# Allegro board backup.brd
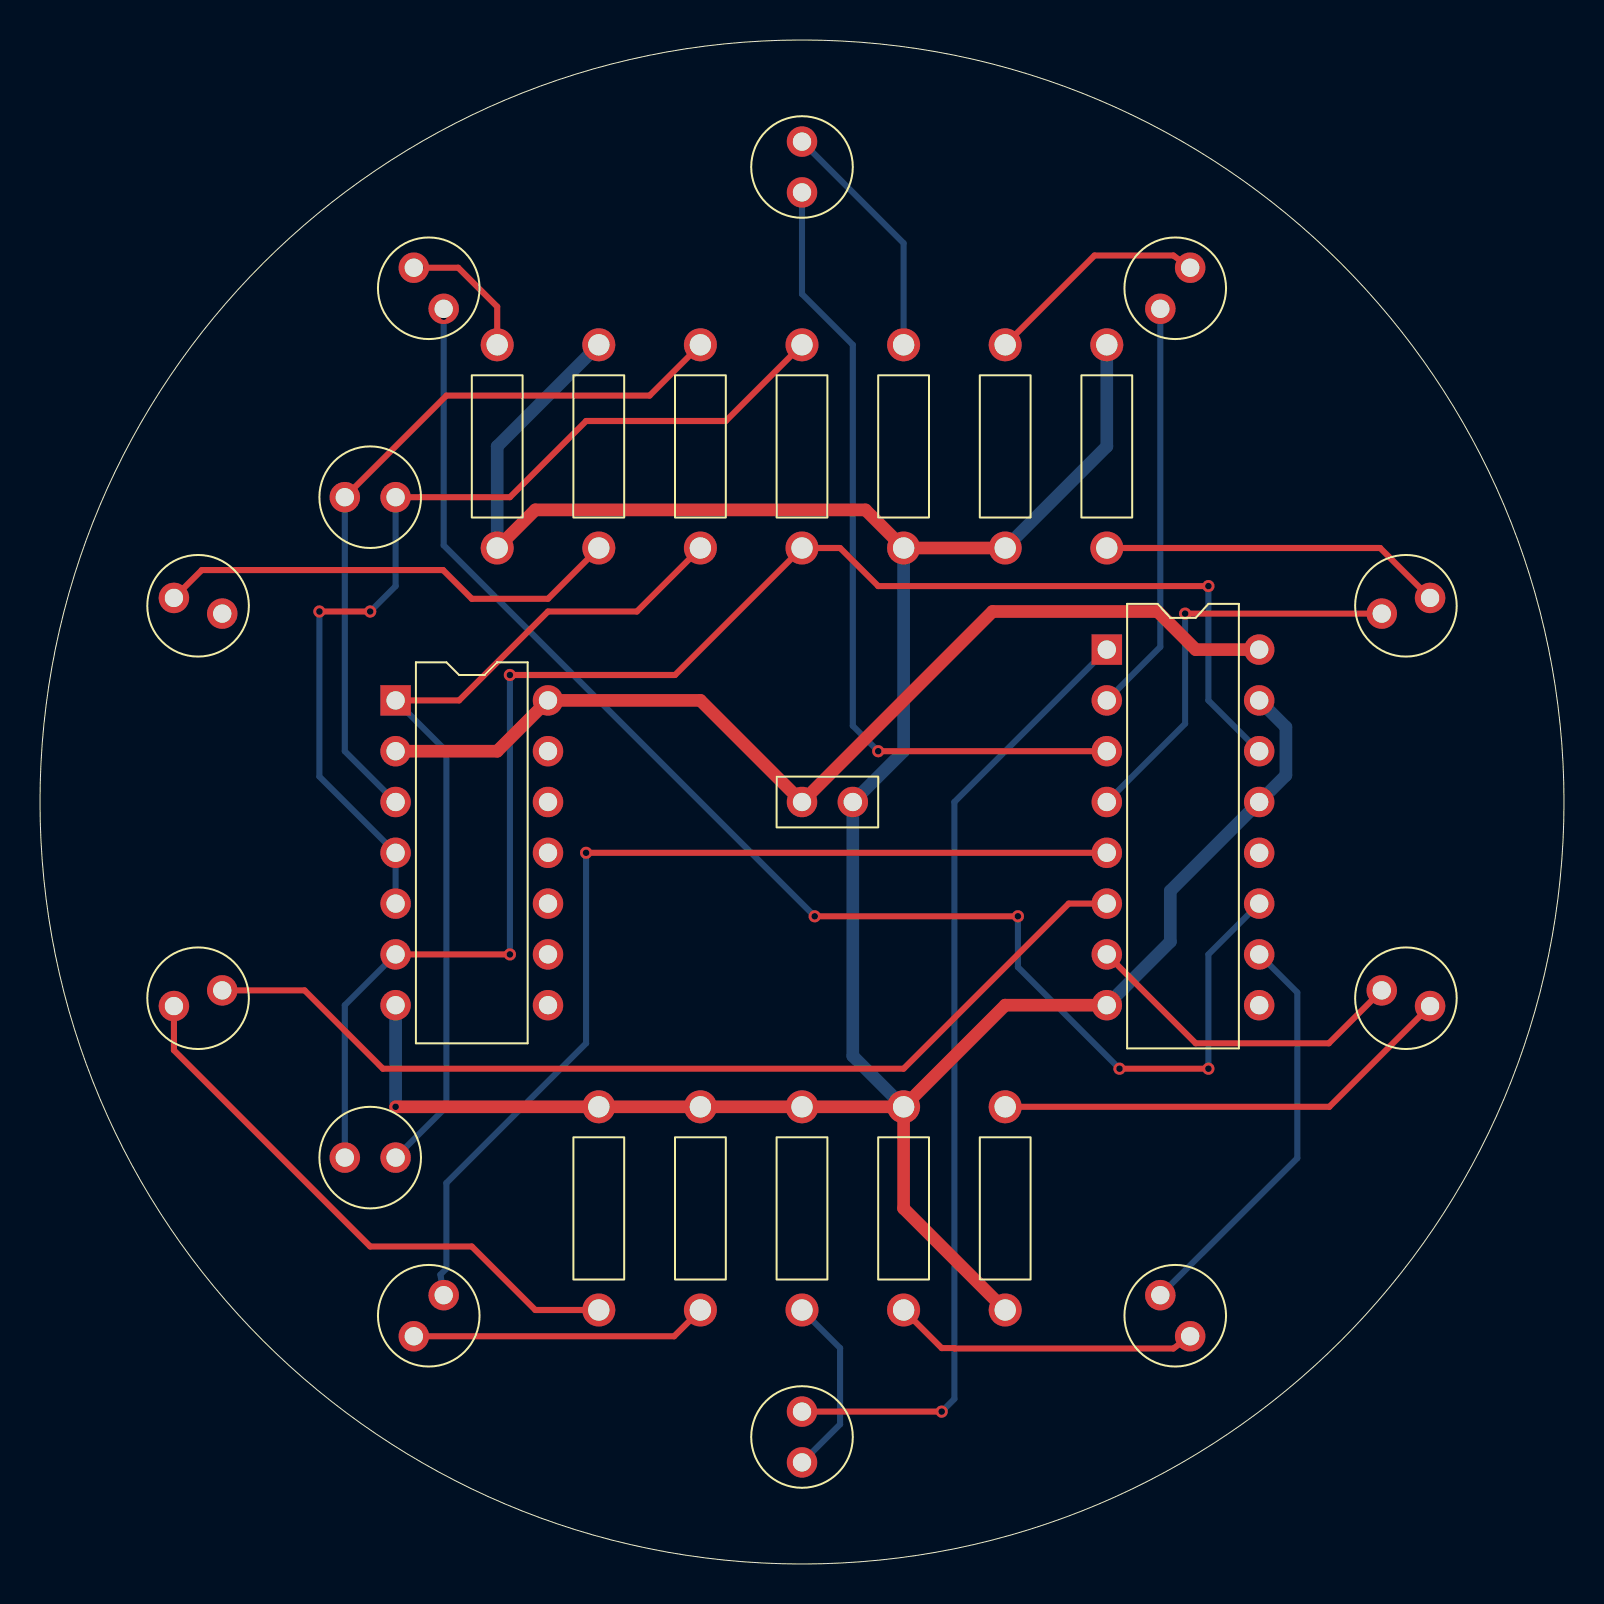
[diagram p0: board, top side]
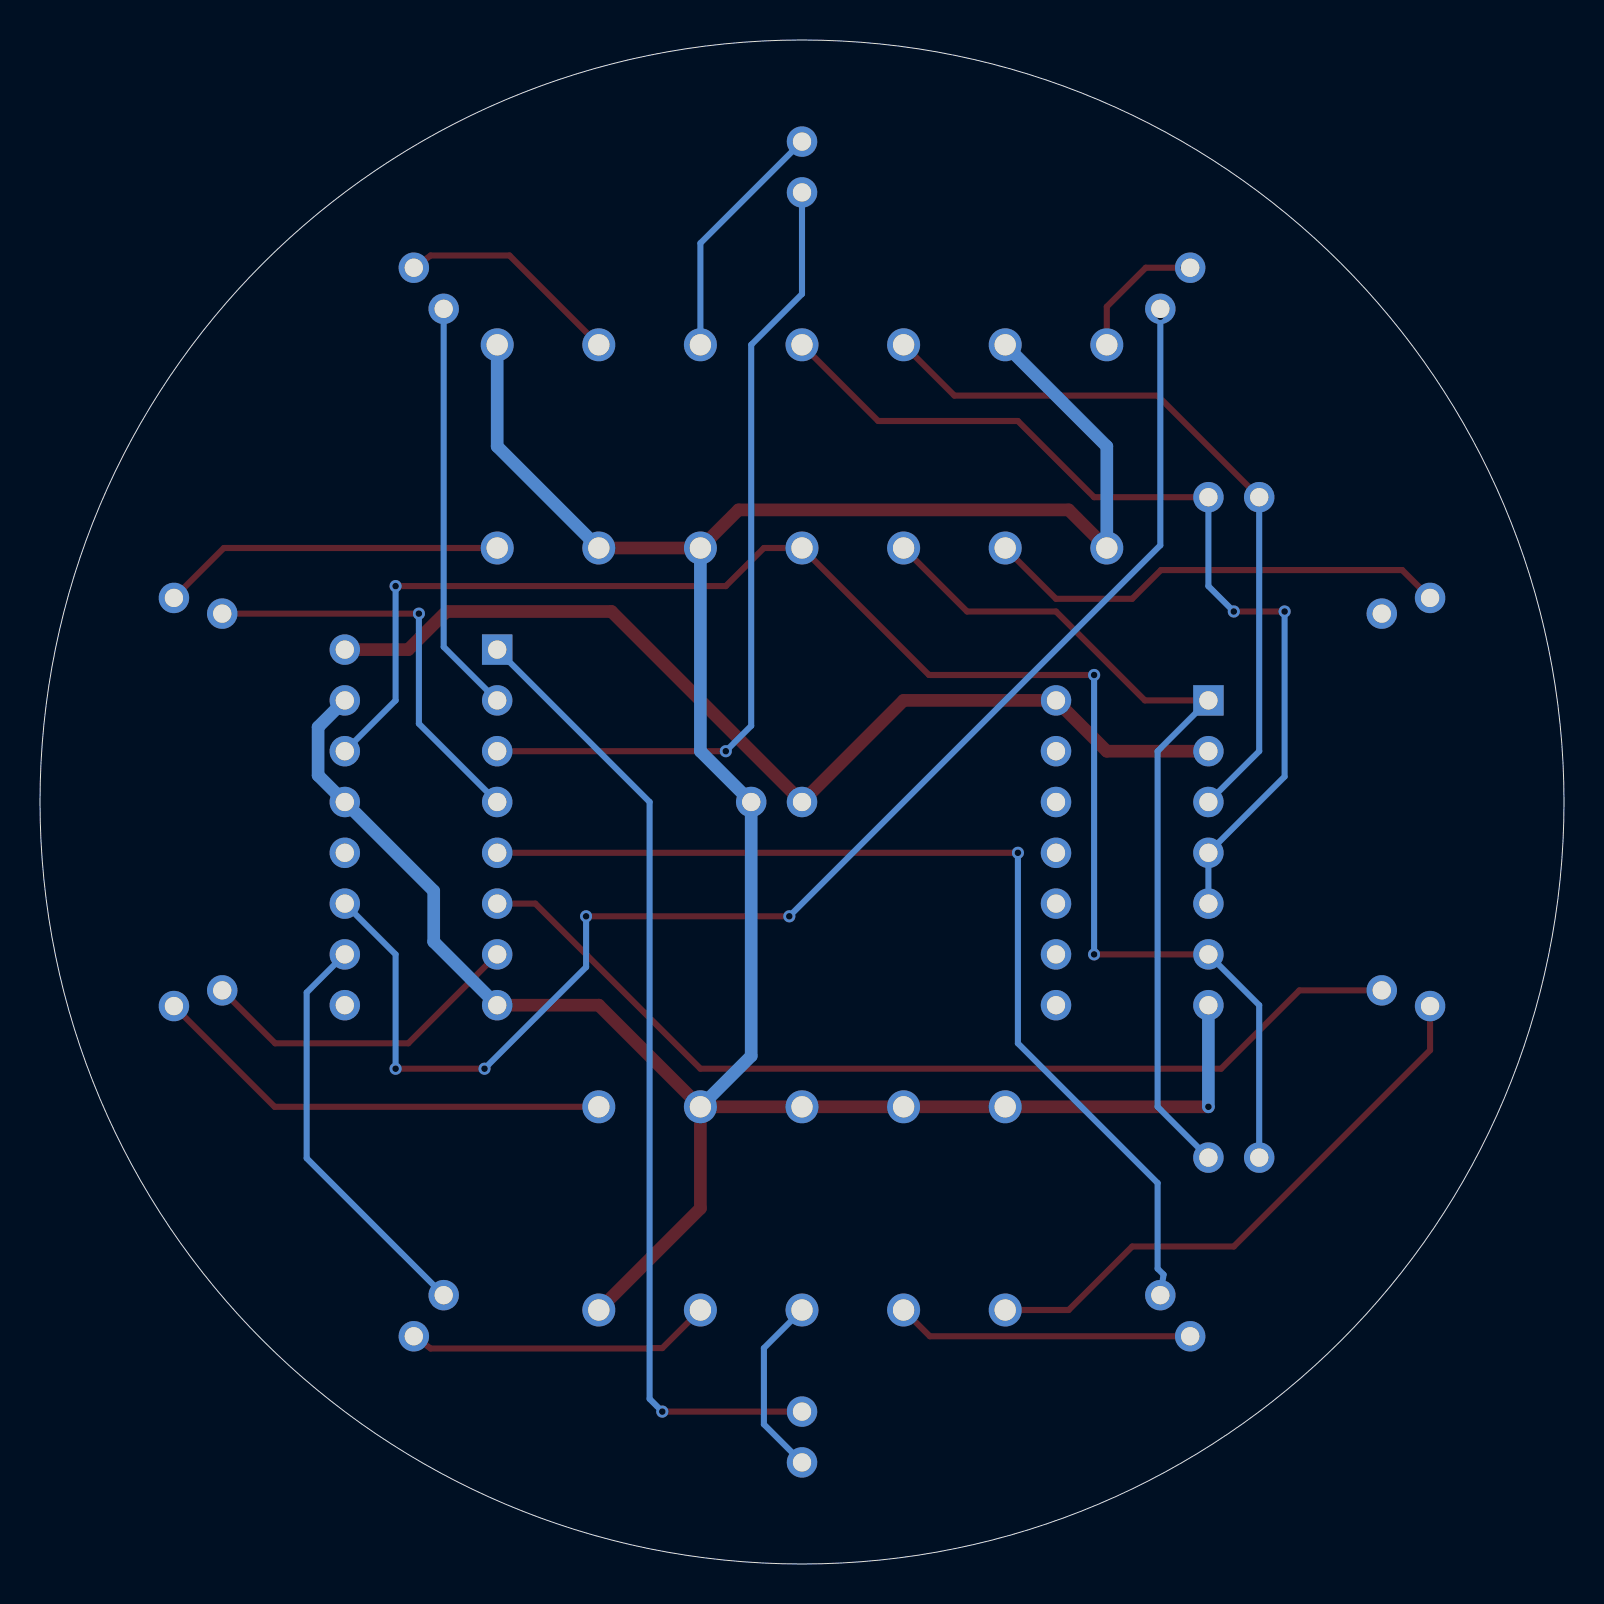
[diagram p1: board, bottom side, seen from below]

Outline 76.2 x 76.2 mm; copper layers: TOP, BOTTOM. Coordinates in mm from the lower left corner of the outline.
Outline path: circle c38.1,38.1 r38.1

## Design rules (mm)
nets with their own width: min track width 0.635; nets GND VCC

## Placement (name value [footprint] x y rotation side)
BT1  BATTERY  [JUMPER2]  38.1 38.1 0 top
C1  470uF  [CAP196]  15.24 53.34 270 top
C2  470uF  [CAP196]  15.24 20.32 270 top
D1  LED  [CAP196]  38.1 68.58 0 top
D2  LED  [CAP196]  56.02 62.76 324 top
D3  LED  [CAP196]  67.09 47.52 288 top
D4  LED  [CAP196]  67.09 28.68 252 top
D5  LED  [CAP196]  56.02 13.44 216 top
D6  LED  [CAP196]  38.1 7.62 180 top
D7  LED  [CAP196]  20.18 13.44 144 top
D8  LED  [CAP196]  9.11 28.68 108 top
D9  LED  [CAP196]  9.11 47.52 72 top
D10  LED  [CAP196]  20.18 62.76 36 top
R1  1k  [RES400]  33.02 60.96 180 top
R2  1k  [RES400]  38.1 60.96 180 top
R3  330  [RES400]  43.18 50.8 0 top
R4  330  [RES400]  48.26 50.8 0 top
R5  330  [RES400]  53.34 60.96 180 top
R6  330  [RES400]  48.26 12.7 0 top
R7  330  [RES400]  43.18 22.86 180 top
R8  330  [RES400]  38.1 22.86 180 top
R9  330  [RES400]  33.02 22.86 180 top
R10  330  [RES400]  27.94 22.86 180 top
R11  330  [RES400]  27.94 60.96 180 top
R12  330  [RES400]  22.86 50.8 0 top
U1  74LS00  [DIP14_3]  17.78 43.18 0 top
U2  CD4017B  [DIP16_3]  53.34 45.72 0 top

## Library data of the parts
BT1 = BATTERY: User Part Number: ***
C1 C2 = CAP: Tolerance: ***; User Part Number: ***
D1 = LED: Tolerance: ***; User Part Number: ***
D2-D10 = LED: User Part Number: ***; Tolerance: ***
R1-R12 = R: Tolerance: ***; User Part Number: ***
U1 = 74LS00: Tolerance: ***; User Part Number: ***
U2 = CD4017B: Tolerance: ***; User Part Number: ***

## Footprints (pads in the part's own frame, mm; a bottom-side part is the same pattern mirrored in y, then rotated)
CAP196
  round 1.524 hole 0.914: 1(0,0) 2(0,2.54)
DIP14_3
  rect 1.524x1.524 hole 0.914: 1(0,0)
  round 1.524 hole 0.914: 2(0,-2.54) 3(0,-5.08) 4(0,-7.62) 5(0,-10.16) 6(0,-12.7) 7(0,-15.24) 8(7.62,-15.24) 9(7.62,-12.7) 10(7.62,-10.16) 11(7.62,-7.62) 12(7.62,-5.08) 13(7.62,-2.54) 14(7.62,0)
DIP16_3
  rect 1.524x1.524 hole 0.914: 1(0,0)
  round 1.524 hole 0.914: 2(0,-2.54) 3(0,-5.08) 4(0,-7.62) 5(0,-10.16) 6(0,-12.7) 7(0,-15.24) 8(0,-17.78) 9(7.62,-17.78) 10(7.62,-15.24) 11(7.62,-12.7) 12(7.62,-10.16) 13(7.62,-7.62) 14(7.62,-5.08) 15(7.62,-2.54) 16(7.62,0)
JUMPER2
  round 1.524 hole 0.914: 1(0,0) 2(2.54,0)
RES400
  round 1.651 hole 1.067: 1(0,0) 2(0,10.16)

## Nets
GND: BT1.2(-) R3.1 R4.1 R5.1 R6.1 R7.1 R8.1 R9.1 R10.1 R11.1 R12.1 U1.7 U2.8 U2.13(C\K\E\) U2.15(RST)
VCC: BT1.1(+) U1.2(B) U1.14 U2.16(VDD)
N00817: C2.2 R1.2 U1.1(A)
N00832: C2.1 R2.2 U1.6(Y) U2.14(CLK)
N01324: D1.1(ANODE) U2.3(Q0)
N01364: D2.1(ANODE) U2.2(Q1)
N01448: D3.1(ANODE) U2.4(Q2)
N01540: D4.1(ANODE) U2.7(Q3)
N01640: D5.1(ANODE) U2.10(Q4)
N01748: D6.1(ANODE) U2.1(Q5)
N01807: D7.1(ANODE) U2.5(Q6)
N01929: D8.1(ANODE) U2.6(Q7)
N02059: D9.1(ANODE) U2.9(Q8)
N02197: D10.1(ANODE) U2.11(Q9)
N12221: C1.1 R1.1 U1.3(Y)
N14797: C1.2 R2.1 U1.4(A) U1.5(B)
N16175: D1.2(CATHODE) R3.2
N16274: D2.2(CATHODE) R4.2
N16375: D3.2(CATHODE) R5.2
N16478: D4.2(CATHODE) R6.2
N16583: D5.2(CATHODE) R7.2
N16690: D6.2(CATHODE) R8.2
N16799: D7.2(CATHODE) R9.2
N16910: D8.2(CATHODE) R10.2
N17023: D9.2(CATHODE) R11.2
N17138: D10.2(CATHODE) R12.2

Pads without a net: U1 8 9 10 11 12 13; U2 12

## Via types
v1: diameter 0.61, hole 0.33, TOP to BOTTOM, 38 vias

## Routing (per net, layer and track width the routed paths; a pad name or vN(x,y) marks a point on that pad's centre or on a via; arc(x,y) is an arc through that point)
GND: length 156.1
  TOP w0.635: U2.8 48.26,27.94 v1(43.18,22.86) ; v1(43.18,22.86) v1(38.1,22.86) R9.1 R10.1 v1(17.78,22.86) ; v1(43.18,22.86) 43.18,17.78 R6.1 ; R4.1 v1(43.18,50.8) 41.27,52.7 24.77,52.7 v1(22.86,50.8)
  BOTTOM w0.635: v1(43.18,50.8) 43.18,40.64 v1(40.64,38.1) 40.64,25.4 v1(43.18,22.86) ; U2.15 62.29,41.85 62.29,39.43 v1(60.96,38.1) 56.52,33.66 56.52,31.11 U2.8 ; v1(17.78,22.86) v1(17.78,27.94) ; R5.1 53.34,55.88 R4.1 ; v1(22.86,50.8) 22.86,55.88 v1(27.94,60.96)
VCC: length 51.1
  TOP w0.635: v1(17.78,40.64) 22.86,40.64 v1(25.4,43.18) 33.02,43.18 BT1.1 47.62,47.62 55.88,47.62 57.78,45.72 U2.16
N00817: length 43.4
  TOP w0.305: v1(17.78,43.18) 20.95,43.18 25.4,47.62 29.84,47.62 R1.2
  BOTTOM w0.305: C2.2 20.32,22.86 20.32,40.64 v1(17.78,43.18)
N00832: length 78.5
  TOP w0.305: v1(23.5,44.45) 31.75,44.45 R2.2 40.01,50.8 41.91,48.9 v1(58.42,48.9) ; v1(23.5,30.48) U1.6
  BOTTOM w0.305: U1.6 15.24,27.94 C2.1 ; U2.14 58.42,43.18 v1(58.42,48.9) ; v1(23.5,44.45) v1(23.5,30.48)
N01324: length 40.9
  TOP w0.305: v1(41.91,40.64) U2.3
  BOTTOM w0.305: v1(41.91,40.64) 40.64,41.91 40.64,60.96 38.1,63.5 v1(38.1,68.58)
N01364: length 20.7
  BOTTOM w0.305: D2.1 56.02,45.86 U2.2
N01448: length 20.9
  TOP w0.305: v1(67.09,47.52) v1(57.26,47.52)
  BOTTOM w0.305: U2.4 57.26,42.02 v1(57.26,47.52)
N01540: length 16.7
  TOP w0.305: D4.1 64.44,26.04 57.78,26.04 U2.7
N01640: length 20.7
  BOTTOM w0.305: D5.1 62.87,20.29 62.87,28.57 v1(60.96,30.48)
N01748: length 48.5
  TOP w0.305: v1(45.09,7.62) D6.1
  BOTTOM w0.305: v1(53.34,45.72) 45.72,38.1 45.72,8.26 v1(45.09,7.62)
N01807: length 51.2
  TOP w0.305: U2.5 v1(27.3,35.56)
  BOTTOM w0.305: v1(27.3,35.56) 27.3,26.04 20.32,19.05 20.32,14.77 20.02,14.47 D7.1
N01929: length 49.3
  TOP w0.305: v1(9.11,28.68) 13.23,28.68 17.14,24.77 43.18,24.77 51.44,33.02 U2.6
N02197: length 71.7
  TOP w0.305: v1(38.73,32.38) v1(48.9,32.38) ; D10.1 v1(20.18,62.37) ; v1(53.98,24.77) v1(58.42,24.77)
  BOTTOM w0.305: U2.11 58.42,30.48 v1(58.42,24.77) ; v1(48.9,32.38) 48.9,29.84 v1(53.98,24.77) ; v1(20.18,62.37) 20.18,50.94 v1(38.73,32.38)
N12221: length 37.2
  TOP w0.305: v1(15.24,53.34) 20.32,58.42 30.48,58.42 R1.1
  BOTTOM w0.305: v1(15.24,53.34) 15.24,40.64 U1.3
N14797: length 48.4
  TOP w0.305: v1(17.78,53.34) 23.5,53.34 27.3,57.15 34.29,57.15 R2.1 ; v1(16.51,47.62) v1(13.97,47.62)
  BOTTOM w0.305: v1(17.78,53.34) 17.78,48.9 v1(16.51,47.62) ; U1.5 U1.4 13.97,39.37 v1(13.97,47.62)
N16175: length 12.3
  BOTTOM w0.305: R3.2 43.18,66.04 D1.2
N16274: length 11.3
  TOP w0.305: D2.2 56.67,65.43 52.73,65.43 R4.2
N16375: length 17.2
  TOP w0.305: R5.2 67.01,50.8 D3.2
N16478: length 23.3
  TOP w0.305: D4.2 64.47,22.86 R6.2
N16583: length 15.3
  TOP w0.305: R7.2 45.09,10.79 45.72,10.79 45.74,10.77 56.67,10.77 D5.2
N16690: length 9.2
  BOTTOM w0.305: D6.2 40.01,6.99 40.01,10.79 v1(38.1,12.7)
N16799: length 14.9
  TOP w0.305: D7.2 31.71,11.39 R9.2
N16910: length 28.8
  TOP w0.305: R10.2 24.77,12.7 21.59,15.88 16.51,15.88 6.7,25.69 v1(6.7,27.9)
N17023: length 23.5
  TOP w0.305: R11.2 25.4,48.26 21.59,48.26 20.15,49.7 8.09,49.7 v1(6.7,48.3)
N17138: length 6.9
  TOP w0.305: R12.2 22.86,62.87 20.91,64.81 v1(19.01,64.81)
  BOTTOM w0.305: D10.2 v1(19.01,64.81)

## Text on the board
PAGE_OUTLINE: JangTaehee
